# Altium PCB Magnetic Sensor.PcbDoc
Units mil, origin at the board's own origin, x right, y up, seen from the top; angles counter-clockwise.
Board outline 681.64 x 911.69 mil, 2 copper layers (Top Layer, Bottom Layer), stack 62.192 mil thick; 6 components, 40 nets, 24 pads, 5 vias.
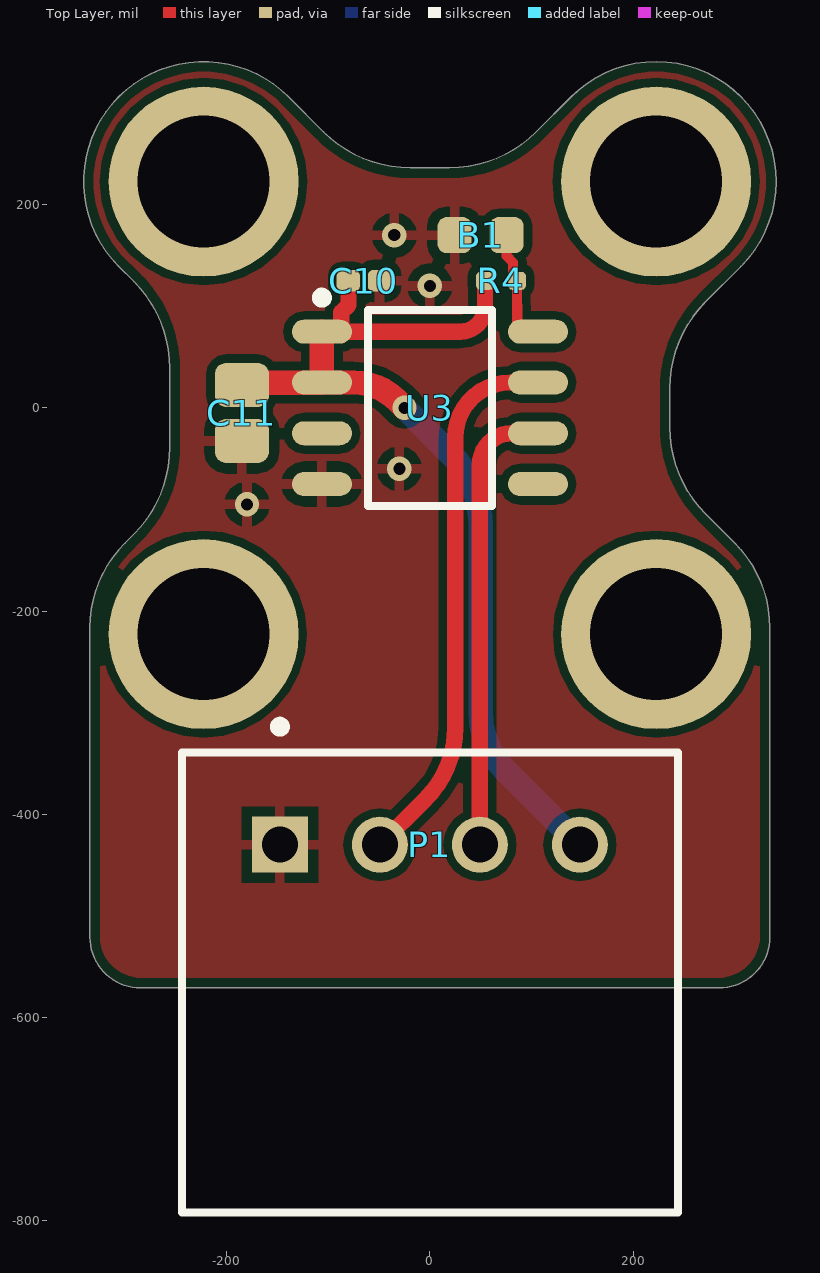
[diagram p0: Top Layer view]
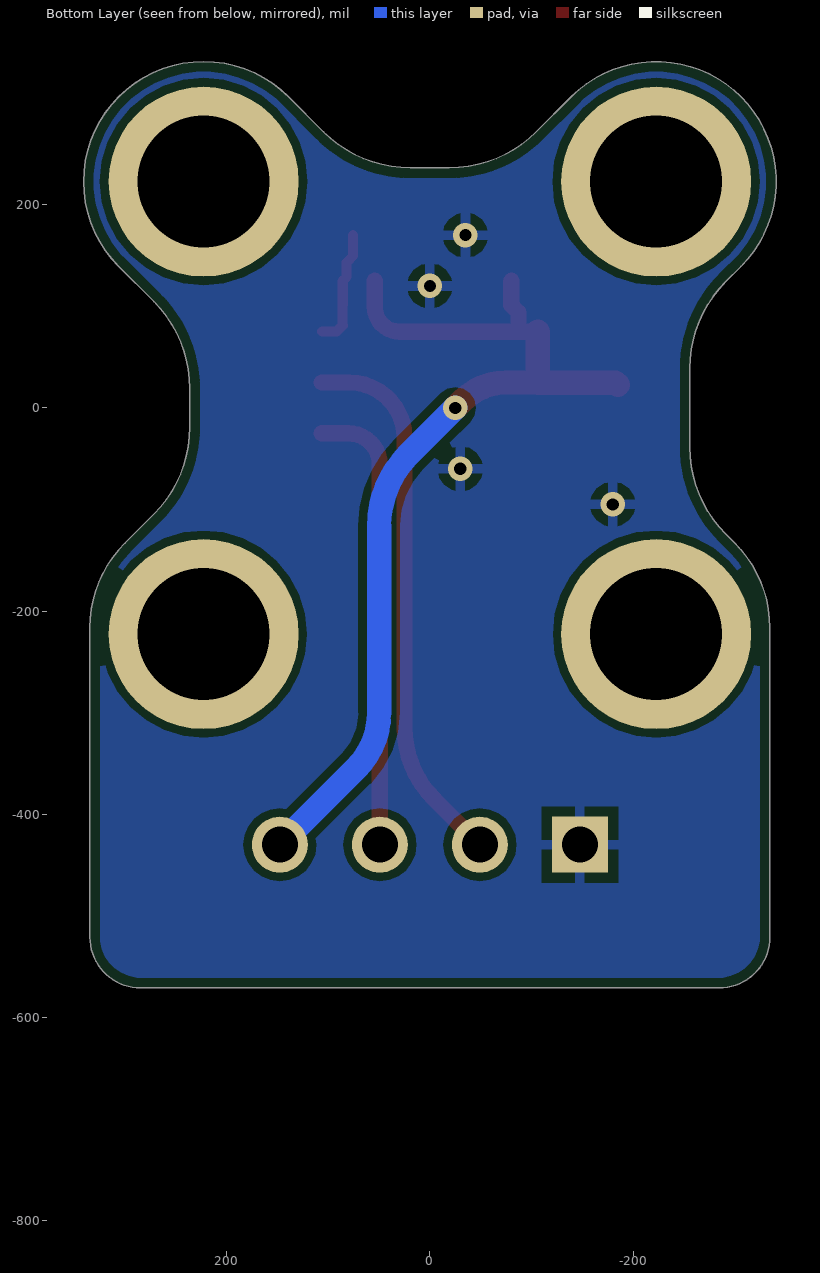
[diagram p1: Bottom Layer view, seen from below]
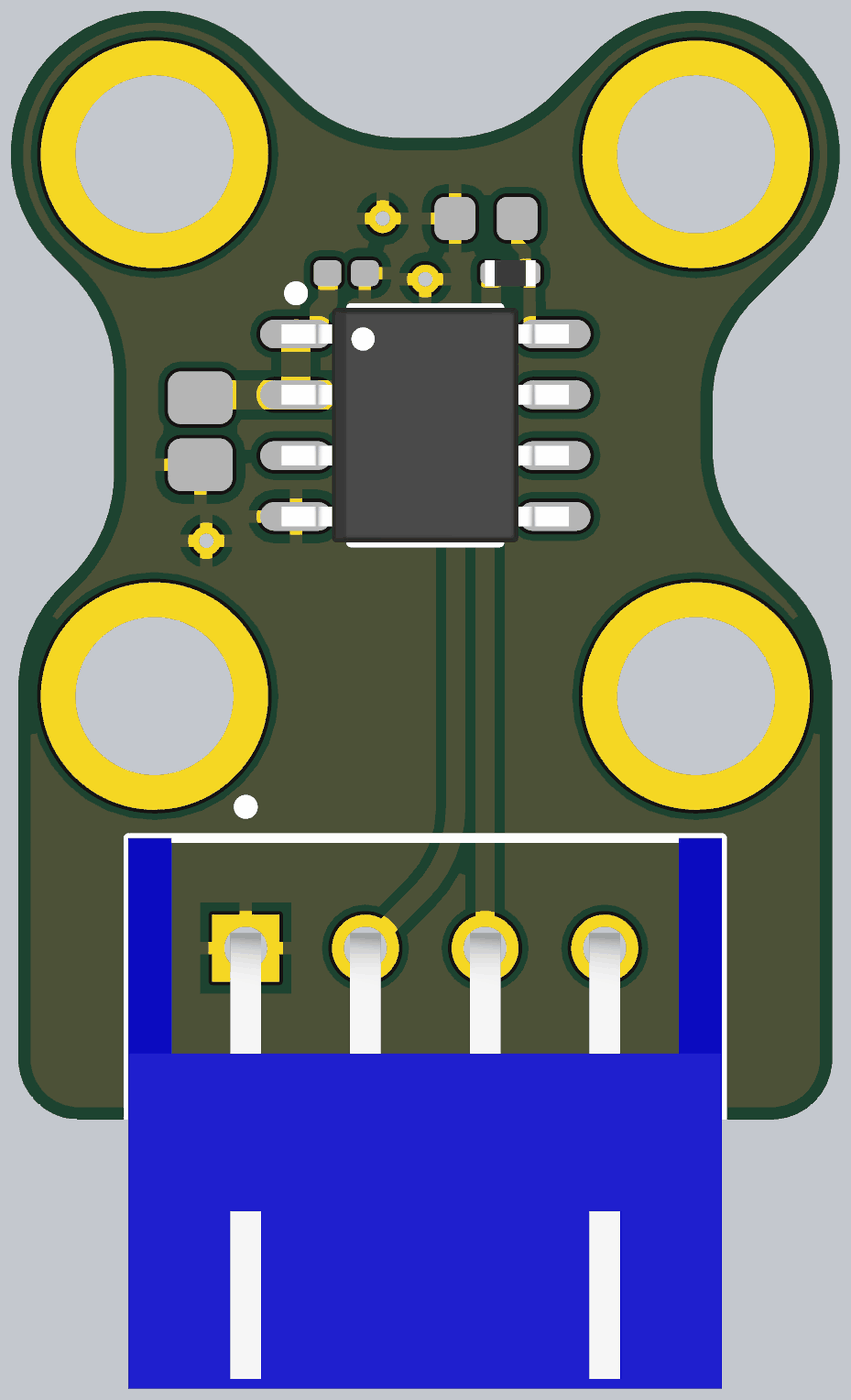
[diagram p2: 3D render of the assembled board from above, using the file's embedded part models]

## Layer stack, top to bottom
Top Solder: solder mask 0.4, Solder Resist, Dk 3.5
Top Layer: signal copper 1.4
Dielectric 1: dielectric 59.3921, FR-4, Dk 4.8
Bottom Layer: signal copper 1.4
Bottom Solder: solder mask 0.4, Solder Resist, Dk 3.5

## Board outline
-334.65,-520.87 -334.65,-216.54 cw(c-216.54,-216.54) -300.05,-133.02 -291.26,-124.23 ccw(c-376.62,-38.87) -255.91,-38.87 -255.91,38.87 ccw(c-376.62,38.87) -291.26,124.23 -306.23,139.19 cw(c-222.71,222.71) -306.23,306.23 cw(c-222.71,222.71) -139.19,306.23 -104.54,271.58 ccw(c-19.19,356.93) -19.19,236.22 19.19,236.22 ccw(c19.19,356.93) 104.54,271.58 139.19,306.23 cw(c222.71,222.71) 306.23,306.23 cw(c222.71,222.71) 306.23,139.19 271.58,104.54 ccw(c356.93,19.19) 236.22,19.19 236.22,-19.19 ccw(c356.93,-19.19) 271.58,-104.54 300.05,-133.02 cw(c216.54,-216.54) 334.65,-216.54 334.65,-520.87 cw(c284.65,-520.87) 284.65,-570.87 -284.65,-570.87 cw(c-284.65,-520.87)

## Design rules (kind name [scope] priority, off if disabled: settings)
BoardOutlineClearance [All] p1: gap=10 ignorepadtopadclearanceinfootprint=FALSE except(0: Arc-SplitContinuation Track-SplitContinuation SMDPad-SplitContinuation THPad-SplitContinuation Via-SplitContinuation Fill-SplitContinuation Poly-SplitContinuation Region-SplitContinuation Text-SplitContinuation)
Clearance [All] p1: gap=8 ignorepadtopadclearanceinfootprint=TRUE except(5: Arc-Arc Arc-Track Arc-SMDPad Track-Track Track-SMDPad SMDPad-SMDPad; 10: Arc-Via Track-Via; 13: Arc-THPad Track-THPad)
DiffPairsRouting [All] p1: maxlimit=10 minlimit=8 mostfreqgap=10 toplayer_minwidth=8 toplayer_maxwidth=16 toplayer_prefwidth=10 bottomlayer_minwidth=8 bottomlayer_maxwidth=16 bottomlayer_prefwidth=10 maxuncoupledlength=500
HoleSize [All] p1: absolutevalues=TRUE maxlimit=248 minlimit=8 maxpercent=80.000 minpercent=20.000
HoleToHoleClearance [All] p1: gap=20 allowstackedmicrovias=TRUE
MinimumAnnularRing [All] p1: minimumring=6
PolygonConnect [All] p1: connectstyle=Relief reliefconductorwidth=10 reliefentries=4 polygonreliefangle="90 Angle" airgapwidth=10
RoutingVias [All] p1: holewidth=28 width=50 viastyle="Through Hole" minholewidth=28 minwidth=50 maxholewidth=28 maxwidth=50
SilkToSolderMaskClearance [IsPad] p1: minsilkscreentomaskgap=6 clearancetoexposedcopper=TRUE
SolderMaskExpansion [All] p1: expansion=3 istentingtop=FALSE
Width [All] p1: maxlimit=30 minlimit=8 preferedwidth=10 minimp=50.000000 maximp=50.000000 favimp=50.000000
26 further rules are at their usual default settings.

## Classes and differential pairs
component class "Motor Controller": R1 R2 R3
differential pair USB: +USB_P -USB_N

## Components (designator, comment, footprint, x,y, rotation, side; value= is the part's Value field where it differs from the comment)
B1 "Solder Bridge" "Solder Bridge" 50,170 r0 top
C10 "100nF" 0402CAP -65,125 r180 top
C11 "10 uF" CAPC2013X140X50LL20T25 -185,-5 r90 top
P1 "S4B-XH-A(LF)(SN)" JST-S4B-XH-A(LF)(SN)_V 0,-430 r0 top
R4 "4.7k" RESC1005X40X25LL05T05 70,125 r0 top
U3 "AS5600-ASOM" SOIC127P600X175-8N 0,0 r0 top

## Footprints (in the part's own frame and the unit in brackets; to place one, negate y for a bottom-side part, rotate by r counter-clockwise, add the part's x,y. Pads: shape width x height; smd on the part's side, far side on the other; paste and mask are expansions set on the pad)
0402CAP [mm] "0402 Capacitor"
  rrect50% 0.58x0.54 smd: 1(-0.39,0) 2(0.39,0)
  body extent -0.55,-0.3 0.55,0.3, height 0.56
CAPC2013X140X50LL20T25 [mm] "Chip Capacitor, 2-Leads, Body 2.00x1.25mm, IPC High Density"
  rrect50% 1.1x1.35 smd: 1(-0.7,0) 2(0.7,0)
  body extent -1.1,-0.72 1.1,0.72, height 1.4
JST-S4B-XH-A(LF)(SN)_V [mm] "Header, 4-Leads, Body 12.4x11.5mm, Pitch 2.5mm"
  rect 1.4x1.4 hole 0.9: 1(-3.75,0)
  round 1.4 hole 0.9: 2(-1.25,0) 3(1.25,0) 4(3.75,0)
  silkscreen extent -6.2,-9.2 6.2,3.08, body extent -6.2,-9.2 6.2,2.3, height 6.15
RESC1005X40X25LL05T05 [mm] "Chip Resistor, 2-Leads, Body 1.05x0.55mm, IPC High Density"
  rrect50% 0.45x0.45 smd: 1(-0.4,0) 2(0.4,0)
  body extent -0.53,-0.28 0.53,0.28, height 0.4
SOIC127P600X175-8N [mm] "SOIC, 8-Leads, Body 4.90x3.90mm, Pitch 1.27mm, IPC Medium Density"
  oval 1.5x0.6 smd: 1(-2.7,1.905) 2(-2.7,0.635) 3(-2.7,-0.635) 4(-2.7,-1.905) 5(2.7,-1.905) 6(2.7,-0.635) 7(2.7,0.635) 8(2.7,1.905)
  silkscreen extent -2.82,-2.45 1.55,2.88, body extent -3,-2.45 3,2.45, height 1.75
"Solder Bridge" [mm]
  rrect50% 0.85x0.9 smd: 1(-0.65,0) 2(0.65,0)

## Part data
C10: library part 04023D104KAT2A, Supplier Part Number 1=478-7869-1-ND, Supplier 1=Digi-Key
C11: library part 0805ZC106KAT2A, Manufacturer="AVX Interconnect / Elco", Supplier Part Number 1=2116198, Part Number=0805ZC106KAT2A, Supplier 1="Future Electronics"
P1: "Male Header, Pitch 2.5 mm, 1 x 4 Position, Height 6.1 mm, Tail Length 3.4 mm, -25 to 85 degC, RoHS, Bulk", Supplier Part Number 1=455-2243-ND, ComponentLink1Description="Manufacturer URL", ComponentLink1URL=http://www.jst.com/home2.html, ComponentLink2Description=Datasheet, ComponentLink2URL=http://www.jst-mfg.com/product/pdf/eng/eXH.pdf, DatasheetVersion=May-16, PackageDescription="Male Header, Pitch 2.5 mm, 1 x 4 Position, Height 6.1 mm, Tail Length 3.4 mm", PackageReference=S4B-XH-A(LF)(SN), Supplier 1=Digi-Key
R4: library part ERJ-2RKF4701X, "Chip Resistor, 4.7 KOhm, +/- 1%, 0.1 W, -55 to 155 degC, 0402 (1005 Metric), RoHS, Tape and Reel", Case Code (Imperial)=0402, Case Code (Metric)=1005, Max Operating Temperature="155 degC", Min Operating Temperature="-55 degC", Package Quantity=1, Power Rating="100 mW", Resistance="4.7 KOhm", Supplier Part Number 1=P4.70KLCT-ND, Tolerance=1%, Voltage Rating="50 V", Case\/Package=0402, ComponentLink1Description="Manufacturer URL", ComponentLink1URL=http://www.panasonic.com/, ComponentLink2Description=Datasheet, ComponentLink2URL=http://industrial.panasonic.com/cdbs/www-data/pdf/RDA0000/AOA0000C86.pdf, DatasheetVersion=04/2015, Height="0.35 mm", Length="1 mm", Mount="Surface Mount", Mounting Technology="Surface Mount", PackageDescription="2-Pin Surface Mount Device, Body 1 x 0.5 mm", PackageReference=0402, Packaging="Cut Tape", PartNumber=ERJ-2RKF4701X, Pins=2, Radiation Hardening=No, REACH SVHC=Yes, RoHSCompliant=true, Supplier 1=Digi-Key, Width="0.5 mm"
U3: "SENSOR ANGLE 360DEG SMD", Max Operating Temperature=125°C, Min Operating Temperature=-40°C, Supplier Part Number 1=AS5600-ASOMCT-ND, Lead Free="Lead Free", Mount="Surface Mount", Sensing Method="Hall Effect", Supplier 1=Digi-Key, Termination=SMD/SMT

## Free pads (board coordinates)
  round 187.01 hole 130: 2(222.71,222.71) 4(-222.71,-222.71) 4(-222.71,222.71) 4(222.71,-222.71)

## Via types
v1: diameter 24, hole 12, Top Layer to Bottom Layer, 5 vias

## Nets (pads, with @x,y where several pads share a name; then routed paths per layer and width w, separated by ;. In a path a pad name is that pad's centre, name@x,y a point inside that pad or via, vN(x,y) a via of type N, cw(c..) or ccw(c..) an arc to the next point about the centre after c; other vN are vias at no path point)
3v3: C10.2 C11.2 P1.4 R4.1 U3.1 U3.2 | length 967.3
  Top Layer w16: U3.1 U3.1@-90.65,75 ; C10.2 -80,124.65 -80,101.3 -87.12,94.18 -87.12,78.52 U3.1@-90.65,75 ; R4.1 54.25,99.25 cw(c30,99.25) 30,75 U3.1@-90.65,75
  Top Layer w24: C11.2 -182.75,24.81 -106.49,24.81 U3.2 ; U3.1 U3.2 ; v1(-25,0) -32.32,7.32 ccw(c-75,-35.36) -75,25 U3.2
  Bottom Layer w24: v1(-25,0) 20.71,-45.71 cw(c-50,-116.42) 50,-116.42 50,-300 ccw(c128.13,-300) 72.88,-355.25 P1.4
\RESET: 
A0: 
A1: 
A2: 
A3: 
A4: 
A5: 
D5: 
D6: 
D9: 
D10: 
D12: 
D13: 
D16: 
D20: 
D21: 
DIR: B1.2 R4.2 U3.8 | length 124.8
  Top Layer w10: B1.2 75.59,149.41 81.89,143.11 81.89,128.86 R4.2 85.75,101.14 85.98,100.91 85.98,81.29 92.27,75 U3.8 ; U3.8@85.75,81.29 U3.8@92.04,75
GND: B1.1 C10.1 C11.1 P1.1 U3.4
  other v1: -180,-95 -30,-60 0,120 -35,170
MISO: 
MOSI: 
NetC7_1: 
NetC8_1: 
NetC9_1: 
NetD1_2: 
NetD2_2: 
NetJ2_2: 
NetJ2_3: 
OUT: U3.3
PGO: U3.5
RX: 
SCK: 
SCL: P1.2 U3.7 | length 539.5
  Top Layer w16: P1.2 -4.29,-385.08 ccw(c-75,-314.37) 25,-314.37 25,-29.15 cw(c79.15,-29.15) 79.15,25 U3.7
SDA: P1.3 U3.6 | length 448.7
  Top Layer w16: P1.3 49.21,-56.21 cw(c80.42,-56.21) 80.42,-25 U3.6
SWCLK: 
SWDIO: 
TX: 
USB_N: 
USB_P: 
VCC: 

## Polygon pours and split planes (outlines as drawn)
GND on Top Layer "GNDPOURT" (solid, pour order 0): -334.65,-520.87 -334.65,-216.54 cw(c-216.54,-216.54) -300.05,-133.02 -291.26,-124.23 ccw(c-376.62,-38.87) -255.91,-38.87 -255.91,38.87 ccw(c-376.62,38.87) -291.26,124.23 -306.23,139.19 cw(c-222.71,222.71) -306.23,306.23 cw(c-222.71,222.71) -139.19,306.23 -104.54,271.58 ccw(c-19.19,356.93) -19.19,236.22 19.19,236.22 ccw(c19.19,356.93) 104.54,271.58 139.19,306.23 cw(c222.71,222.71) 306.23,306.23 cw(c222.71,222.71) 306.23,139.19 271.58,104.54 ccw(c356.93,19.19) 236.22,19.19 236.22,-19.19 ccw(c356.93,-19.19) 271.58,-104.54 300.05,-133.02 cw(c216.54,-216.54) 334.65,-216.54 334.65,-520.87 cw(c284.65,-520.87) 284.65,-570.87 -284.65,-570.87 cw(c-284.65,-520.87)
GND on Bottom Layer "GNDPOURB" (solid, pour order 1): -334.65,-520.87 -334.65,-216.54 cw(c-216.54,-216.54) -300.05,-133.02 -291.26,-124.23 ccw(c-376.62,-38.87) -255.91,-38.87 -255.91,38.87 ccw(c-376.62,38.87) -291.26,124.23 -306.23,139.19 cw(c-222.71,222.71) -306.23,306.23 cw(c-222.71,222.71) -139.19,306.23 -104.54,271.58 ccw(c-19.19,356.93) -19.19,236.22 19.19,236.22 ccw(c19.19,356.93) 104.54,271.58 139.19,306.23 cw(c222.71,222.71) 306.23,306.23 cw(c222.71,222.71) 306.23,139.19 271.58,104.54 ccw(c356.93,19.19) 236.22,19.19 236.22,-19.19 ccw(c356.93,-19.19) 271.58,-104.54 300.05,-133.02 cw(c216.54,-216.54) 334.65,-216.54 334.65,-520.87 cw(c284.65,-520.87) 284.65,-570.87 -284.65,-570.87 cw(c-284.65,-520.87)

## Silkscreen, mask and mechanical layers (free items; w line width, h text height)
Board Shape:
  the board outline again, w10